# Altium PCB IRN-back-BNC.PcbDoc
Units mm, origin at the board's own origin, x right, y up, seen from the top; angles counter-clockwise.
Board outline 72.04 x 19.15 mm, 2 copper layers (Top Layer, Bottom Layer), stack 1.071 mm thick; 8 components, 4 nets, 25 pads, 0 vias.
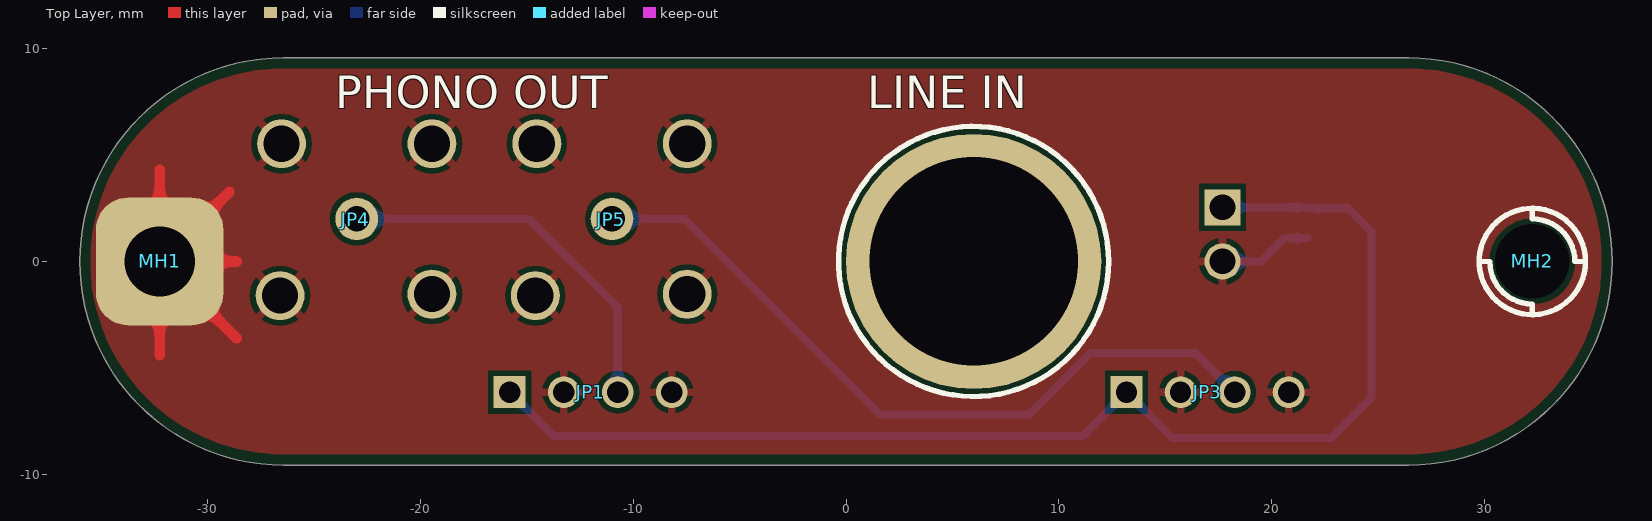
[diagram p0: Top Layer view]
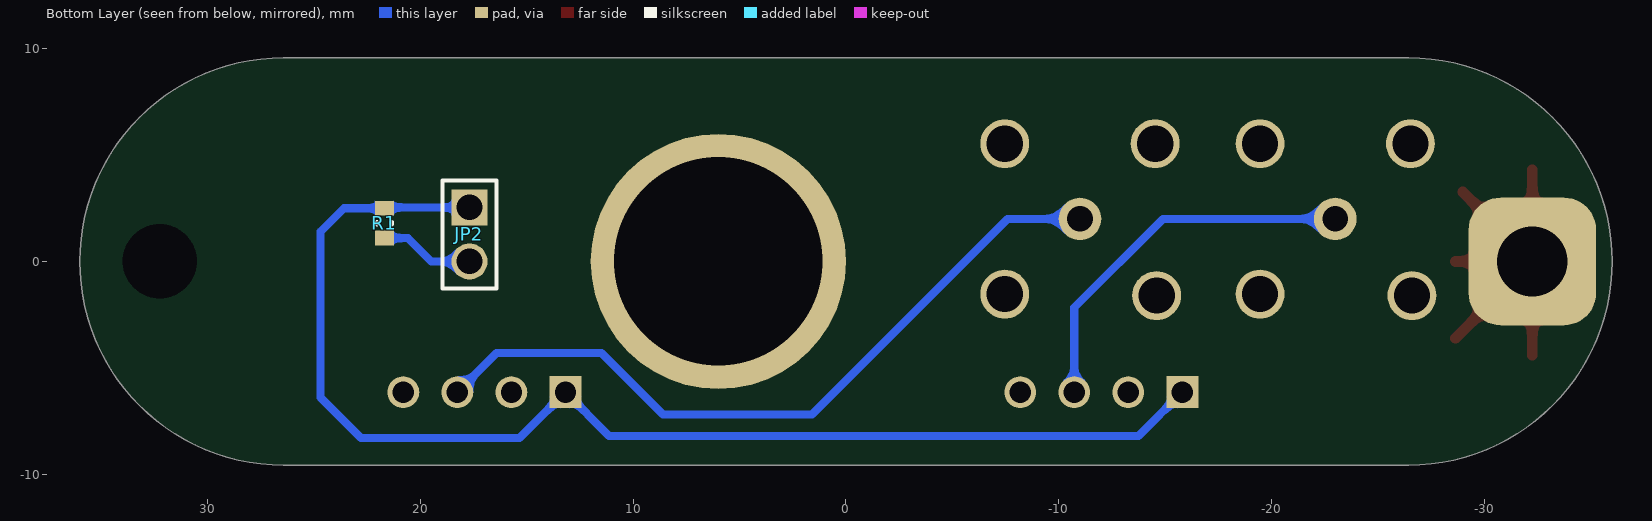
[diagram p1: Bottom Layer view, seen from below]

## Layer stack, top to bottom
Top Solder: solder mask 0.0102, Solder Resist, Dk 3.5
Top Layer: signal copper 0.0356
Dielectric 1: dielectric 1, FR-4, Dk 4.8
Bottom Layer: signal copper 0.0356
Bottom Solder: solder mask 0.0102, Solder Resist, Dk 3.5

## Board outline
-26.445,-9.575 26.445,-9.575 ccw(c26.445,0) 26.445,9.575 -26.445,9.575 ccw(c-26.445,0)

## Design rules (kind name [scope] priority, off if disabled: settings)
BoardOutlineClearance [All] p1: gap=0.5 ignorepadtopadclearanceinfootprint=FALSE
Clearance [All] p1: gap=0.254 ignorepadtopadclearanceinfootprint=FALSE except(0: Arc-Hole Track-Hole SMDPad-Hole THPad-Hole Via-Hole Fill-Hole Poly-Hole Region-Hole Text-Hole)
HoleSize [All] p1: absolutevalues=TRUE maxlimit=10 minlimit=0.3 maxpercent=80.000 minpercent=20.000
PolygonConnect PolygonConnect_GND [InNet('GND') vs HasFootprint('MECH_MHOLE_3.5-GND')] p1: connectstyle=Direct reliefconductorwidth=0.254 reliefentries=4 polygonreliefangle="90 Angle" airgapwidth=0.254
PolygonConnect PolygonConnect_GND_1 [InNet('GND') vs HasFootprint('MECH_USB_MICRO_CUTOUT')] p2: connectstyle=Direct reliefconductorwidth=0.254 reliefentries=4 polygonreliefangle="90 Angle" airgapwidth=0.254
PolygonConnect [All] p3: thpad.connectstyle=Relief thpad.reliefconductorwidth=0.381 thpad.reliefentries=4 thpad.polygonreliefangle="90 Angle" thpad.airgapwidth=0.254 smdpad.connectstyle=Direct smdpad.reliefconductorwidth=0.254 smdpad.reliefentries=4 smdpad.polygonreliefangle="90 Angle" smdpad.airgapwidth=0.254 via.connectstyle=Relief via.reliefconductorwidth=0.254 via.reliefentries=4 via.polygonreliefangle="90 Angle" via.airgapwidth=0.254
RoutingVias [All] p1: holewidth=0.711 width=1.27 viastyle="Through Hole" minholewidth=0.711 minwidth=1.27 maxholewidth=0.711 maxwidth=1.27
SilkToSolderMaskClearance [IsPad] p1: minsilkscreentomaskgap=0 clearancetoexposedcopper=TRUE
SolderMaskExpansion [All] p1: expansion=0.102
Width [All] p1: maxlimit=1 minlimit=0.254 preferedwidth=0.254
28 further rules are at their usual default settings.

## Components (designator, comment, footprint, x,y, rotation, side; value= is the part's Value field where it differs from the comment)
JP1 "CONN_1x4" CONN_HDR1X4-No3D -12,-6.145 r0 top
JP2 "HDR1X2" CONN_HDR1X2 17.7,2.54 r270 bottom
JP3 "CONN_1x4" CONN_HDR1X4-No3D 17,-6.145 r0 top
JP4 "RCA RED" CONN_RCA-Lumberg-BTOR -23,2 r45 top value=RED
JP5 "RCA BLACK" CONN_RCA-Lumberg-BTOR -11,2 r45 top value=BLACK
MH1 "Mounting hole" MECH_MHOLE_3.5-GND -32.265,0 r0 top
MH2 "Mounting hole" MECH_MHOLE_3.5 32.265,0 r0 top
R1 "RES0603" RESC0603(1608)_L 21.7,1.8 r270 bottom value=50R

## Footprints (in the part's own frame and the unit in brackets; to place one, negate y for a bottom-side part, rotate by r counter-clockwise, add the part's x,y. Pads: shape width x height; smd on the part's side, far side on the other; paste and mask are expansions set on the pad)
CONN_HDR1X2 [mm] "Connector; Header; 2 Position; 2.54 mm"
  rect 1.7x1.7 hole 1.2: 1(0,0)
  round 1.7 hole 1.2: 2(2.54,0)
  silkscreen extent -1.27,-1.27 3.81,1.27, body extent -1.27,-1.27 3.81,1.27, height 8.6
CONN_HDR1X4-No3D [mm] "Connector; Header; 4 Position"
  rect 1.5x1.5 hole 1: 1(-3.81,0)
  round 1.5 hole 1: 2(-1.27,0) 3(1.27,0) 4(3.81,0)
CONN_RCA-Lumberg-BTOR [mm] "BTOR 1"
  round 2 hole 1.2: 1(0,0)
  round 2.3 hole 1.7: 2(-5.1,0) 2(0,5) 2(0,-5) 2(5,0)
  body extent -5,-5 5,5, height 17.01
MECH_MHOLE_3.5 [mm] "Mounting hole 3.5mm"
  round 0 hole 3.5 unplated mask+2.5: 0(0,0)
  silkscreen extent -2.5,-2.5 2.5,2.5, body extent -2,-2 2,2, height 1.61
MECH_MHOLE_3.5-GND [mm] "Mounting hole 3.5mm"
  rrect50% 6x6 hole 3.3: 0(0,0)
  body extent -2,-2 2,2, height 1.61
RESC0603(1608)_L [mm]
  rect 0.7x0.9 smd: 1(-0.7,0) 2(0.7,0)
  silkscreen extent -0.05,-0.35 0.05,0.35, body extent -0.85,-0.47 0.85,0.47, height 0.6

## Part data
JP1 JP3: library part CONN_MHDR_1x4, "Header, 4-Pin", MPN=0470531000, DigiKey=WM4330-ND, LatestRevisionDate=17-Jul-2002, LatestRevisionNote="Re-released for DXP Platform.", Publisher="Altium Limited"
JP2: library part CONN_MHDR1X2, "Header, 2-Pin", ELFA=43-808-61
JP4: library part CONN_RCA_LUMBERG_BTOR_1_RED, "RCA panel-mount socket red, 1553 02 rot, Lumberg Connect GmbH", MPN="BTOR 1 ROT", ELFA=300-68-470, Farnell=1368644
JP5: library part CONN_RCA_LUMBERG_BTOR_1_BLACK, "RCA panel-mount socket red, 1553 02 rot, Lumberg Connect GmbH", MPN="BTOR 1 SCHWARZ", ELFA=300-68-471, Farnell=1217030
MH1 MH2: library part MECH_MHOLE
R1: library part CMP-1591-00001-1, "0603 (1608 Metric) Chip Resistor", Case-EIA=0603, Case-Metric=1608, Tolerance=0.1%, Farnell=2687606, PackageReference=RESC0603(1608)

## Free pads (board coordinates)
  round 12 hole 9.8 unplated: 0(6,0)

## Nets (pads, with @x,y where several pads share a name; then routed paths per layer and width w, separated by ;. In a path a pad name is that pad's centre, name@x,y a point inside that pad or via, vN(x,y) a via of type N, cw(c..) or ccw(c..) an arc to the next point about the centre after c; other vN are vias at no path point)
GND: JP1.2 JP1.4 JP2.2 JP3.2 JP3.4 JP4.2 JP5.2 MH1.0 R1.2 | length 26.5
  Top Layer w0.5: -32.265,-4.401 -32.265,-3.75 MH1.0 ; -32.265,4.309 MH1.0 ; -29,3.265 -29.174,3.091 MH1.0 ; -28.65,-3.615 -29.174,-3.091 MH1.0 ; -28.65,0 MH1.0
  Bottom Layer w0.381: JP2.2 19.5,0 20.6,1.1 R1.2
VIN: JP1.1 JP2.1 JP3.1 R1.1 | length 59.2
  Bottom Layer w0.381: JP1.1 -13.755,-8.2 11.135,-8.2 JP3.1 15.345,-8.3 22.8,-8.3 24.7,-6.4 24.7,1.4 23.6,2.5 R1.1 21.66,2.54 JP2.1
VOUTL: JP1.3 JP4.1 | length 18
  Bottom Layer w0.381: JP4.1 -14.9,2 -10.73,-2.17 JP1.3
VOUTR: JP3.3 JP5.1 | length 35
  Bottom Layer w0.381: JP5.1 -7.6,2 1.6,-7.2 8.6,-7.2 11.5,-4.3 16.425,-4.3 JP3.3
pads on no net: MH2.0

## Polygon pours and split planes (outlines as drawn)
GND on Top Layer "Top Layer-GND" (solid, pour order 4): -37,-10 38,-10 38,11 -37,11

## Silkscreen, mask and mechanical layers (free items; w line width, h text height)
Top Overlay:
  circle w0.254: c6,0 r6.35
  text "PHONO OUT" at -24,7.2 h1.52
  text "LINE IN" at 1,7.2 h1.52
Mechanical 1:
  the board outline again, w0.2